# Altium PCB Basic_Board.PcbDoc
Units mm, origin at the board's own origin, x right, y up, seen from the top; angles counter-clockwise.
Board outline 48.64 x 27.18 mm, 2 copper layers (Top Layer, Bottom Layer); 38 components, 61 nets, 232 pads, 48 vias.
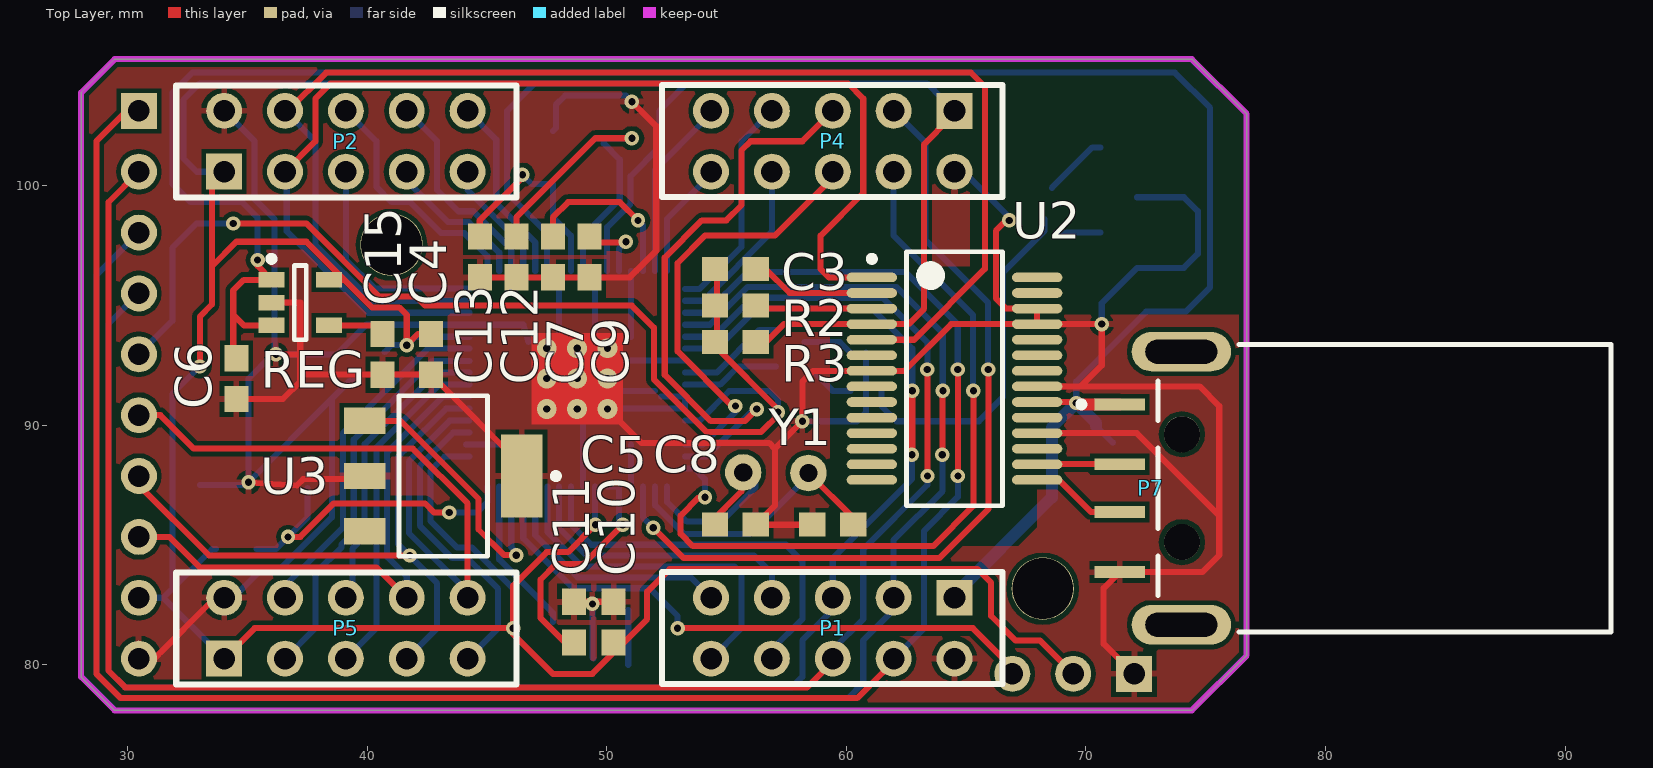
[diagram p0: Top Layer view]
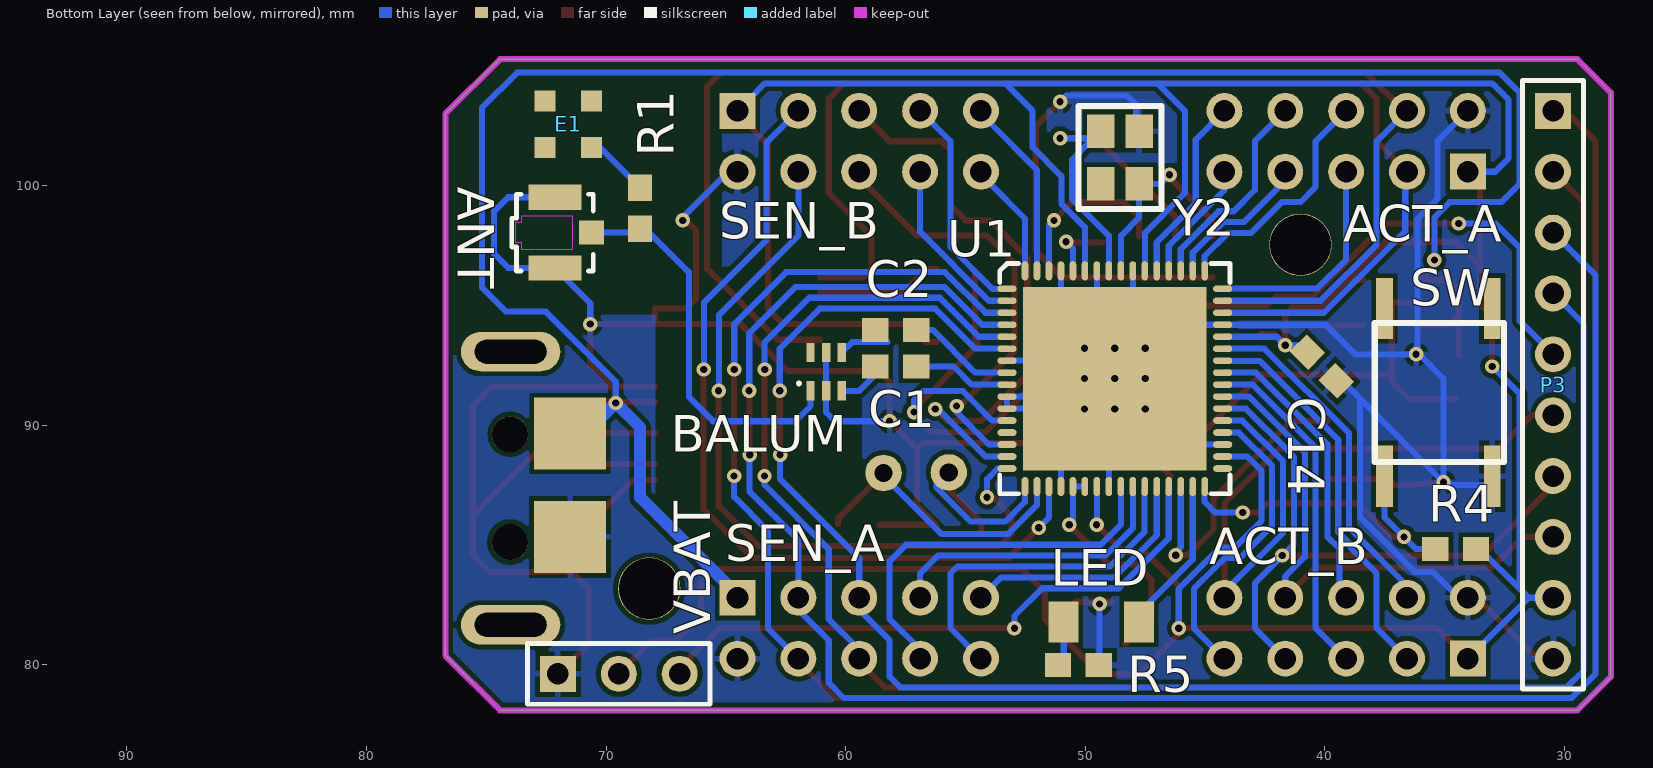
[diagram p1: Bottom Layer view, seen from below]

## Layer stack, top to bottom
Top Layer: signal copper 0.0356
Dielectric: dielectric 0.32, FR-4, Dk 4.8
Bottom Layer: signal copper 0.0356

## Board outline
29.464,78.105 28.067,79.502 28.067,103.886 29.464,105.283 74.422,105.283 76.708,102.997 76.708,80.391 74.422,78.105

## Design rules (kind name [scope] priority, off if disabled: settings)
Clearance [All] p1: gap=0.2
PolygonConnect [All] p1: connectstyle=Relief reliefconductorwidth=0.254 reliefentries=4 polygonreliefangle="90 Angle"
RoutingVias [All] p1: holewidth=0.3 width=0.6 viastyle="Through Hole" minholewidth=0.3 minwidth=0.8 maxholewidth=0.5 maxwidth=0.6
SilkscreenOverComponentPads [All] p1: minsilkscreentomaskgap=0.254
SolderMaskExpansion [All] p1: expansion=0.102
Width [All] p1: maxlimit=0.5 minlimit=0.15 preferedwidth=0.254
27 further rules are at their usual default settings.

## Components (designator, comment, footprint, x,y, rotation, side; value= is the part's Value field where it differs from the comment)
ANT "SMB" U.FL-R-SMT 72.136,98.044 r90 bottom (schematic designator ANT1)
BALUM "2.45 GHz" BALUN_SMD 61.468,91.44 r0 bottom (schematic designator BAL1)
C1 "Cap" 1608[0603] 57.912,92.456 r0 bottom
C2 "Cap" 1608[0603] 57.912,93.98 r0 bottom
C3 "Cap" 1608[0603] 55.372,96.52 r180 top (schematic designator C5)
C4 "Cap" 1608[0603] 42.672,92.964 r90 top
C5 "Cap" 1608[0603] 55.372,85.852 r0 top
C6 "Cap" 1608[0603] 34.544,91.948 r270 top
C7 "Cap" 1608[0603] 47.752,97.028 r270 top
C8 "Cap" 1608[0603] 59.436,85.852 r180 top
C9 "Cap" 1608[0603] 49.276,97.028 r270 top
C10 "Cap" 1608[0603] 50.292,81.788 r90 top
C11 "Cap" 1608[0603] 48.641,81.788 r270 top
C12 "Cap" 1608[0603] 46.228,97.028 r90 top
C13 "Cap" 1608[0603] 44.704,97.028 r90 top
C14 "Cap" 1608[0603] 40.132,92.456 r225 bottom
C15 "Cap" 1608[0603] 40.64,92.964 r90 top
E1 "Antenna" "Antennas 2.4G SMD MOLEX" 70.612,101.6 r90 bottom
LED "TX" 3015[1206] 47.752,81.788 r0 bottom (schematic designator D1)
P1 "SEN_A" HDR2X5_Female_Slim 64.516,82.804 r180 top
P2 "ACT_A" HDR2X5_Female_Slim 34.036,100.584 r0 top
P3 "Header 10" HDR1X10 30.48,103.124 r270 bottom
P4 "SEN_B" HDR2X5_Female_Slim 64.516,103.124 r180 top
P5 "ACT_B" HDR2X5_Female_Slim 34.036,80.264 r0 top
P7 "USB Type A" USBA_SMD 76.708,87.376 r0 top
R1 "Res2" 1608[0603] 68.58,99.06 r270 bottom
R2 "Res2" 1608[0603] 55.372,94.996 r0 top
R3 "Res2" 1608[0603] 55.372,93.472 r0 top (schematic designator R5)
R4 "Res2" 1608[0603] 34.544,84.836 r0 bottom
R5 "Res2" 1608[0603] 50.292,80 r180 bottom
REG "LD6806TD/33H" DBV005_N 37.211,95.123 r0 top
SW "SW-PB" "BUTTON SWITCH" 33.02,87.376 r90 bottom (schematic designator S1)
U1 "ATmega128RFA1-DE" MLF64-M2 48.768,91.948 r0 bottom
U2 "IC_FT232RL" SSOP-28 64.516,91.948 r0 top
U3 "DS2401Z" SOT-223 43.18,87.884 r270 top
VBAT "Header 2" HDR1X3 72.009,79.629 r180 bottom
Y1 "32.768KHz" Crystal 58.42,88.011 r180 top
Y2 "16MHz" "CrystalSMD TSX3225" 47.752,100.076 r90 bottom

## Footprints (in the part's own frame and the unit in brackets; to place one, negate y for a bottom-side part, rotate by r counter-clockwise, add the part's x,y. Pads: shape width x height; smd on the part's side, far side on the other; paste and mask are expansions set on the pad)
1608[0603] [mm] "Chip Capacitor; Body 1.6 x 0.8 mm (LxW typ)"
  rect 1.1x1 smd: 1(-0.85,0) 2(0.85,0)
  body extent -1,-0.5 0.9,0.5, height 1.3
3015[1206] [mm] "Chip Capacitor; Body 3.0 x 1.5 mm (LxW typ)"
  rect 1.25x1.7 smd: 1(0,0) 2(3.15,0)
  body extent 0,-0.9 3.15,0.9, height 1.3
"Antennas 2.4G SMD MOLEX" [mm]
  rect 0.87x0.87 smd mask+0.335: 1(0,0) ""(0,1.94) ""(1.94,0) ""(1.94,1.94)
BALUN_SMD [mm] "Harmonic Filter-Balun; Body 2.0 x 1.25 mm"
  rect 0.35x0.8 smd: 1(0,0) 2(-0.65,0) 3(-1.3,0) 4(-1.3,-1.6) 5(-0.65,-1.6) 6(0,-1.6)
  silkscreen extent 0.48,-0.3 0.48,-0.3, body extent -1.65,-1.43 0.35,-0.18, height 0.8
"BUTTON SWITCH" [mm]
  rect 2.55x0.7 smd: 1(0.5,0) 2(0.5,4.5) 3(7.5,0) 4(7.5,4.5)
  silkscreen extent 1.1,-0.5 6.9,4.9
Crystal [mil]
  round 60 hole 30: 1(0,0) 2(107.28,-0.99)
"CrystalSMD TSX3225" [mm]
  rect 1.4x1.15 smd: 1(0,0) 2(2.2,0) 3(2.2,1.6) 4(0,1.6)
  silkscreen extent -1.05,-0.93 3.25,2.53
DBV005_N [mm] "SOT23, 5-Leads, Body 2.9x1.6mm, Pitch 0.95mm, Lead Span 2.8mm, IPC Medium Density"
  rect 1.1x0.65 smd: 1(-1.2,0.95) 2(-1.2,0) 3(-1.2,-0.95) 4(1.2,-0.95) 5(1.2,0.95)
  silkscreen extent -1.32,-1.55 0.25,1.95, body extent -0.9,-1.55 0.9,1.55, height 1.45
HDR1X3 [mm] "Connector; Header; 3 Position"
  rect 1.5x1.5 hole 0.9: 1(0,0)
  round 1.5 hole 0.9: 2(2.54,0) 3(5.08,0)
  silkscreen extent -1.27,-1.27 6.35,1.27
HDR1X10 [mm] "Connector; Header; 10 Position"
  rect 1.5x1.5 hole 0.9: 1(0,0)
  round 1.5 hole 0.9: 2(2.54,0) 3(5.08,0) 4(7.62,0) 5(10.16,0) 6(12.7,0) 7(15.24,0) 8(17.78,0) 9(20.32,0) 10(22.86,0)
  silkscreen extent -1.27,-1.27 24.13,1.27
HDR2X5_Female_Slim [mm] "Connector; Header; 5x2 Housing"
  rect 1.5x1.5 hole 0.9: 1(0,0)
  round 1.5 hole 0.9: 2(0,2.54) 3(2.54,0) 4(2.54,2.54) 5(5.08,0) 6(5.08,2.54) 7(7.62,0) 8(7.62,2.54) 9(10.16,0) 10(10.16,2.54)
  silkscreen extent -2,-1.07 12.2,3.6
MLF64-M2 [mm]
  oval 0.8x0.28 smd paste-0.03 mask+0: 1(4.5,-3.75) 2(4.5,-3.25) 3(4.5,-2.75) 4(4.5,-2.25) 5(4.5,-1.75) 6(4.5,-1.25) 7(4.5,-0.75) 8(4.5,-0.25) 9(4.5,0.25) 10(4.5,0.75) 11(4.5,1.25) 12(4.5,1.75) 13(4.5,2.25) 14(4.5,2.75) 15(4.5,3.25) 16(4.5,3.75) 33(-4.5,3.75) 34(-4.5,3.25) 35(-4.5,2.75) 36(-4.5,2.25) 37(-4.5,1.75) 38(-4.5,1.25) 39(-4.5,0.75) 40(-4.5,0.25) 41(-4.5,-0.25) 42(-4.5,-0.75) 43(-4.5,-1.25) 44(-4.5,-1.75) 45(-4.5,-2.25) 46(-4.5,-2.75) 47(-4.5,-3.25) 48(-4.5,-3.75)
  oval 0.28x0.8 smd paste-0.03 mask+0: 17(3.75,4.5) 18(3.25,4.5) 19(2.75,4.5) 20(2.25,4.5) 21(1.75,4.5) 22(1.25,4.5) 23(0.75,4.5) 24(0.25,4.5) 25(-0.25,4.5) 26(-0.75,4.5) 27(-1.25,4.5) 28(-1.75,4.5) 29(-2.25,4.5) 30(-2.75,4.5) 31(-3.25,4.5) 32(-3.75,4.5) 49(-3.75,-4.5) 50(-3.25,-4.5) 51(-2.75,-4.5) 52(-2.25,-4.5) 53(-1.75,-4.5) 54(-1.25,-4.5) 55(-0.75,-4.5) 56(-0.25,-4.5) 57(0.25,-4.5) 58(0.75,-4.5) 59(1.25,-4.5) 60(1.75,-4.5) 61(2.25,-4.5) 62(2.75,-4.5) 63(3.25,-4.5) 64(3.75,-4.5)
  rect 7.65x7.65 smd paste-2.8 mask+0: 65(0,0)
  silkscreen extent -4.8,-4.8 4.8,4.8
SOT-223 [mm] "SOT-223/SC-73; 4 Leads; Body 6.7 x 7.3 mm, inc. leads (LxW max)"
  rect 3.45x1.75 smd: 1(0,3.275)
  rect 1.1x1.75 smd: 2(-2.3,-3.275) 3(2.3,-3.275) 4(0,-3.275)
  silkscreen extent -3.35,-1.85 3.35,4.83
SSOP-28 [mm] "28-Pin SSOP 0.65 mm Pitch"
  oval 2.1x0.4 smd: 1(-3.45,4.225) 2(-3.45,3.575) 3(-3.45,2.925) 4(-3.45,2.275) 5(-3.45,1.625) 6(-3.45,0.975) 7(-3.45,0.325) 8(-3.45,-0.325) 9(-3.45,-0.975) 10(-3.45,-1.625) 11(-3.45,-2.275) 12(-3.45,-2.925) 13(-3.45,-3.575) 14(-3.45,-4.225) 15(3.45,-4.225) 16(3.45,-3.575) 17(3.45,-2.925) 18(3.45,-2.275) 19(3.45,-1.625) 20(3.45,-0.975) 21(3.45,-0.325) 22(3.45,0.325) 23(3.45,0.975) 24(3.45,1.625) 25(3.45,2.275) 26(3.45,2.925) 27(3.45,3.575) 28(3.45,4.225)
  silkscreen extent -3.57,-5.3 2,5.3, body extent -2.7,-5.3 2.7,5.3, height 2
U.FL-R-SMT [mm]
  rect 1x1.05 smd: 1(0,-1.525)
  rect 1.05x2.2 smd: 2(-1.475,0) 2(1.475,0)
  Top Layer keep-out region: -0.686,-0.737 0.686,-0.737 0.686,1.397 0.406,1.397 0.406,1.651 -0.406,1.651 -0.406,1.397 -0.686,1.397
  silkscreen extent -1.6,-1.6 1.6,1.8, body extent -1.5,-1.55 1.5,1.55, height 1.25
USBA_SMD [mm]
  rect 2.1x0.5 smd: 1(-5.3,3.5) 2(-5.3,1) 3(-5.3,-1) 4(-5.3,-3.5)
  oval 4.15x1.65 hole 1 slot 3 at 0 deg: 5(-2.725,-5.7) 5(-2.725,5.7)
  round 1.5 hole 1.5: MH1(-2.7,-2.25) MH2(-2.7,2.25)
  silkscreen extent -7.02,-6 15.2,6, body extent -3.7,-6 15.2,6, height 4.5

## Part data
ANT: "SMB Straight Connector"
BALUM: library part BALUN
C1 C2 C3 C4 C5 C6 C7 C8 C9 C10 C11 C12 C13 C14 C15: "Capacitor"
E1: "Generic Antenna"
LED: library part "LED SMD (0603)"
P1 P2 P4 P5: library part "Header 5X2", "Header, 5-Pin, Dual row"
P3: "Header, 10-Pin"
P7: library part "Header 4", "Header, 4-Pin"
R1 R2 R3 R4 R5: "Resistor"
REG: library part TC1014-1.8VCT713, "50 mA, 100 mA and 150 mA CMOS LDOs with Active-Low Shutdown and Reference Bypass, 5-Pin SOT-23, Extended Temperature, Tape and Reel"
SW: "Switch"
U1: "802.15.4 compliant AVR transceiver"
U2: "FT232R USB UART"
U3: "Silicon Serial Number"
VBAT: library part "Header 3", "Header, 3-Pin"
Y1 Y2: library part XTAL, "Crystal Oscillator"

## Free pads (board coordinates)
  round 2.6 hole 2.54: 0(41.021,97.536) 0(68.199,83.185)
  rect 3x3 smd far side: 0(71.501,85.344) 0(71.501,89.662)

## Via types
v1: diameter 0.6, hole 0.3, Top Layer to Bottom Layer, 39 vias
v2: diameter 0.83, hole 0.3, Top Layer to Bottom Layer, 9 vias

## Nets (pads, with @x,y where several pads share a name; then routed paths per layer and width w, separated by ;. In a path a pad name is that pad's centre, name@x,y a point inside that pad or via, vN(x,y) a via of type N, cw(c..) or ccw(c..) an arc to the next point about the centre after c; other vN are vias at no path point)
5V: C6.1 P1.1 P7.1 pad.0@71.501,89.662 REG.1 REG.3 U2.20 | length 93
  Top Layer w0.254: C6.1@34.417,92.925 34.417,94.615 ; v1(35.433,96.899) 35.433,96.651 REG.1 34.859,96.073 34.417,95.631 34.417,94.615 ; REG.3 34.859,94.173 34.417,94.615 ; U2.20 69.596,90.973 v1@69.693,90.876
  Top Layer w0.5: v1@69.693,90.876 P7.1
  Bottom Layer w0.254: v1(35.433,96.899) 35.433,98.672 34.791,99.314 32.639,99.314 31.877,100.076 31.877,103.886 32.712,104.721 73.714,104.721 75.184,103.251 75.184,95.758 74.168,94.742 72.517,94.742 69.596,91.821 v1(69.596,90.932) ; pad.0@70.421,89.98 pad.0@71.12,89.281
  Bottom Layer w0.5: P1.1@64.389,82.804 68.58,86.995 68.58,89.916 v1(69.596,90.932) 70.421,90.106 pad.0@70.421,89.98
ADC0: P4.9 U1.63 | length 7.4
  Bottom Layer w0.254: U1.63 52.018,100.659 54.038,102.679 P4.9@54.038,103.06
ADC1: P4.10 U1.64 | length 4.6
  Bottom Layer w0.254: U1.64 52.518,98.619 53.975,100.076 P4.10@54.356,100.076
ADC2: P4.7 U1.1 | length 9.3
  Bottom Layer w0.254: U1.1 53.88,95.698 55.626,97.444 55.626,101.854 P4.7
ADC3: P4.8 U1.2 | length 7.3
  Bottom Layer w0.254: U1.2 54.022,95.198 56.896,98.072 P4.8
ADC4: P1.4 P3.1 U1.3 | length 85.8
  Top Layer w0.254: P3.1@29.972,103.124 28.702,101.854 28.702,79.629 29.718,78.613 60.452,78.613 P1.4@61.531,79.692 ; v1(64.651,92.329) 64.659,92.321 v1(64.659,87.884)
  Bottom Layer w0.254: U1.3 54.164,94.698 55.859,96.393 62.484,96.393 64.651,94.226 v1(64.651,92.329) ; P1.4 63.246,81.534 63.246,85.598 64.659,87.011 v1(64.659,87.884)
ADC5: P1.3 P3.3 U1.4 | length 80
  Top Layer w0.254: v1(64.008,88.773) v1@64.008,91.416
  Bottom Layer w0.254: P3.3 28.702,96.266 28.702,79.629 29.718,78.613 60.071,78.613 60.706,79.248 60.706,81.026 61.976,82.296 61.976,85.217 64.016,87.257 64.016,88.765 v1(64.008,88.773) ; U1.4 54.306,94.198 55.885,95.777 62.084,95.777 64.024,93.837 64.024,91.448 v1(64.032,91.44)
ADC6: P1.6 P3.2 U1.5 | length 78.1
  Top Layer w0.254: P3.2 29.21,99.314 29.21,79.763 29.906,79.067 58.366,79.067 P1.6@58.991,79.692 ; v1@63.381,87.892 v1(63.381,92.329)
  Bottom Layer w0.254: U1.5 54.448,93.698 56.073,95.323 61.522,95.323 63.381,93.464 v1(63.381,92.329) ; P1.6 59.436,80.645 60.706,81.915 60.706,84.836 63.389,87.519 v1(63.389,87.884)
ADC7: P1.5 P3.4 U1.6 | length 72.1
  Top Layer w0.254: v1@62.754,88.789 v1(62.754,91.44)
  Bottom Layer w0.254: P3.4 29.21,94.234 29.21,79.763 29.906,79.067 57.731,79.067 58.166,79.502 58.166,81.026 59.436,82.296 P1.5 59.436,84.455 62.738,87.757 v1(62.738,88.773) ; U1.6 54.59,93.198 56.261,94.869 61.087,94.869 62.754,93.202 v1(62.754,91.44)
CHG_SEN: U1.29 VBAT.3 | length 25.1
  Top Layer w0.254: v1(52.959,81.534) 65.278,81.534 VBAT.3@66.914,79.898
  Bottom Layer w0.254: U1.29 46.518,85.28 48.597,83.201 51.8,83.201 52.959,82.042 v1(52.959,81.534)
CTS: U2.11
D+: P7.3 U2.15 | length 4
  Top Layer w0.254: U2.15 68.868,87.723 70.215,86.376 P7.3@71.374,86.376
D-: P7.2 U2.16 | length 3.7
  Top Layer w0.254: U2.16@67.969,88.376 P7.2@71.628,88.392
DTR: C3.1 U2.2 | length 5.3
  Top Layer w0.254: C3.1 56.642,96.52 57.639,95.523 U2.2
GND: ANT.2 BALUM.2 BALUM.5 C4.1 C5.2 C6.2 C7.2 C8.2 C9.2 C10.2 C11.1 C12.1 C13.1 C14.2 C15.1 P1.2 P2.2 P3.10 P4.2 P5.2 P7.4 pad.0@71.501,85.344 R5.2 REG.2 SW.1 U1.7 U1.10 U1.11 U1.20 U1.24 U1.35 U1.45 U1.55 U1.58 U1.61 U1.65 U2.7 U2.18 U2.21 U2.25 U2.26 U3.1 U3.4 VBAT.1 Y2.2 | length 219.9
  Top Layer w0.254: P3.10 31.115,80.264 33.655,82.804 P5.2 ; C6.2 36.488,91.098 37.211,91.821 37.211,92.964 ; v1(35.052,87.622) 37.076,87.495 37.338,87.757 39.778,87.757 U3.4 ; REG.2@35.884,95.123 REG.2 37.211,95.123 37.211,92.964 ; v1(36.195,92.964) 37.211,92.964 ; 37.25,92.114 C15.1 C4.1 U3.1@46.571,88.215 ; C13.1 C12.1 C7.2 C9.2 50.966,96.178 51.235,96.447 51.235,96.454 52.07,97.289 52.07,102.489 v1(51.054,103.505) ; U3.1 U3.1@46.709,88.138 ; C11.1@48.895,82.638 C10.2@50.419,82.638 ; v2(50.038,90.679) 51.447,89.27 56.78,89.27 57.023,89.027 ; C8.2 C5.2 57.023,86.653 57.023,89.027 ; v1(66.802,98.552) 66.802,98.679 66.24,98.117 66.24,95.304 66.671,94.873 U2.26 U2.25 ; U2.18 72.125,89.673 75.565,86.233 ; U2.21 69.779,91.623 ; VBAT.1@72.446,79.446 72.173,79.446 70.739,80.881 70.739,83.207 P7.4 74.859,83.876 75.565,84.582 75.565,86.233 ; 57.023,89.027 v1(58.166,90.17) 58.166,91.821 58.618,92.273 U2.7 62.428,92.273 64.378,94.223 U2.25 ; U2.25 v1(70.661,94.223) 70.661,92.505 69.779,91.623 ; 69.779,91.623 74.747,91.623 75.565,90.805 75.565,86.233
  Bottom Layer w0.254: SW.1@33.02,87.503 35.052,87.503 v1(35.052,87.622) ; P5.2 34.422,82.804 35.499,83.881 36.256,83.881 38.535,86.16 38.535,91.105 ; P2.2 35.306,101.854 35.306,99.441 36.142,98.605 36.142,93.271 v1@36.195,93.218 ; v1@36.068,92.964 35.052,91.948 v1(35.052,87.622) ; v1(36.195,92.964) v1@36.195,93.218 ; C14.2@39.285,91.855 38.535,91.105 ; C14.2@39.412,91.855 C14.2 ; U1.35@44.141,89.198 U1.65@45.891,89.198 ; U1.65@46.736,93.472 46.518,94.198 U1.45 39.969,94.198 38.735,92.964 36.449,92.964 v1@36.195,93.218 ; Y2.2 47.879,102.403 47.879,103.378 48.26,103.759 50.8,103.759 v1(51.054,103.505) ; U1.65@48.018,92.698 U1.55 ; U1.65@48.768,91.44 U1.65@52.021,91.44 ; U1.24 U1.65@49.018,90.678 ; v1(49.403,82.55) 49.403,80.303 R5.2@49.442,80.264 ; U1.65@49.518,92.698 U1.7 ; U1.65@49.518,92.71 U1.58 ; U1.65@50.038,90.698 U1.11 U1.10 U1.65@52.263,91.198 ; U1.20 U1.65@51.018,89.19 ; U1.65@51.018,93.69 U1.61 ; v1(58.166,90.17) 60.452,90.17 60.818,90.536 BALUM.2 BALUM.5 ; P4.2@64.897,100.584 66.802,98.679 v1(66.802,98.552) ; v1(70.661,94.223) 70.661,95.094 72.136,96.569 74.09,96.569 74.676,97.155 74.676,98.933 74.09,99.519 ANT.2@72.136,99.519 ; v1(35.052,87.622) 38.535,91.105
  other v2: 47.498,90.678 48.768,90.679 47.498,91.948 48.768,91.949 50.038,91.949 47.498,93.217 48.768,93.218 50.038,93.218
MISO: P3.8 P5.8 U1.39 | length 23
  Top Layer w0.254: P3.8 31.75,85.344 33.02,84.074 40.386,84.074 P5.8
  Bottom Layer w0.254: P5.8 41.656,83.693 40.84,84.509 40.84,88.874 43.164,91.198 U1.39
MOSI: P3.7 P5.7 U1.38 | length 26.3
  Top Layer w0.254: P3.7 30.48,87.503 33.415,84.568 v1(41.783,84.568)
  Bottom Layer w0.254: P5.7 42.926,81.534 42.926,83.407 41.294,85.039 41.294,88.686 41.56,88.952 43.306,90.698 U1.38
NC: 
NetANT1_1: ANT.1 BALUM.1 R1.2 | length 16.4
  Bottom Layer w0.254: BALUM.1 61.468,90.805 62.103,90.17 65.532,90.17 66.548,91.186 66.548,96.393 68.263,98.108 R1.2@68.263,98.615 ; R1.2@68.746,98.044 ANT.1
NetBAL1_3: BALUM.3 C1.2 | length 1.7
  Bottom Layer w0.254: C1.2@58.737,92.138 59.436,91.44 BALUM.3
NetBAL1_4: BALUM.4 C2.2 | length 2.1
  Bottom Layer w0.254: 58.254,93.472 59.736,93.472 BALUM.4
NetC1_1: C1.1 U1.9 | length 4.1
  Bottom Layer w0.254: U1.9 54.736,91.698 55.494,92.456 C1.1
NetC2_1: C2.1 U1.8 | length 4.5
  Bottom Layer w0.254: U1.8 54.594,92.198 56.376,93.98 C2.1
NetC5_1: C5.1 U1.17 Y1.2 | length 9.7
  Top Layer w0.254: C5.1@54.334,85.532 54.334,85.956 55.626,87.249 55.626,88.348 Y1.2@55.695,88.417
  Bottom Layer w0.254: U1.17 52.518,86.808 53.347,85.979 54.781,85.979 56.203,87.401 Y1.2@56.203,88.417
NetC7_1: C7.1 U1.62 | length 7.1
  Top Layer w0.254: C7.1 47.752,98.679 48.387,99.314 50.546,99.314 v1(51.308,98.552)
  Bottom Layer w0.254: v1(51.308,98.552) 51.518,98.342 U1.62
NetC8_1: C8.1 U1.18 Y1.1 | length 12.1
  Top Layer w0.254: Y1.1 60.325,86.106 C8.1@60.325,85.891
  Bottom Layer w0.254: U1.18 52.018,86.666 53.213,85.471 56.007,85.471 Y1.1@58.801,88.265
NetC9_1: C9.1 U1.60 | length 2.9
  Top Layer w0.254: C9.1@49.276,97.624 50.761,97.624 v1(50.8,97.663)
  Bottom Layer w0.254: U1.60 50.518,97.381 v1(50.8,97.663)
NetC11_2: C11.2 U1.21 U1.22 | length 9.7
  Top Layer w0.254: C11.2@48.348,80.899 48.299,80.899 47.244,81.954 47.244,83.566 47.879,84.201 49.022,84.201 v1(50.673,85.852)
  Bottom Layer w0.254: U1.22 U1.21 50.518,86.007 v1(50.673,85.852)
NetC12_2: C12.2 U1.57 Y2.3 | length 14.7
  Top Layer w0.254: C12.2 46.228,98.679 49.53,101.981 v1(51.054,101.981)
  Bottom Layer w0.254: U1.57 49.018,97.913 50.546,99.441 50.546,100.526 50.546,101.092 Y2.3@49.87,101.768 ; Y2.3@49.565,101.981 v1(51.054,101.981)
NetC13_2: C13.2 U1.56 Y2.1 | length 8.6
  Top Layer w0.254: C13.2 44.704,98.552 v1@46.482,100.33
  Bottom Layer w0.254: v1(46.482,100.457) 46.863,100.076 Y2.1 47.752,98.679 48.51,97.921 U1.56@48.51,96.448
NetC15_2: C15.2 REG.4 | length 2.2
  Top Layer w0.254: REG.4 C15.2@40.64,94.173
NetD1_1: LED.1 U1.31 | length 6.6
  Bottom Layer w0.254: U1.31 45.518,84.405 47.752,82.171 LED.1
NetD1_2: LED.2 R5.1 | length 2.3
  Bottom Layer w0.254: R5.1@50.902,80.01 LED.2@50.902,82.296
NetE1_1: E1.1 R1.1 | length 2.7
  Bottom Layer w0.254: R1.1 70.27,101.6 E1.1
NetR4_2: R4.2 SW.2 U1.32 | length 14.3
  Top Layer w0.254: v1(36.703,85.344) 37.211,85.344 38.608,86.741 42.418,86.741 42.799,86.36 v1(43.434,86.36)
  Bottom Layer w0.254: R4.2 36.195,84.836 v1(36.703,85.344) ; v1@36.703,85.471 v1(36.703,85.344) ; SW.2@37.52,86.962 37.52,87.376 37.52,86.161 v1(36.703,85.344) ; v1(43.434,86.36) 44.577,86.36 45.018,86.801 U1.32
NetU1_30: U1.30 U3.2 | length 12.5
  Top Layer w0.254: U3.2 41.395,90.184 44.65,86.929 44.65,85.652 45.72,84.582 v1(46.228,84.582)
  Bottom Layer w0.254: U1.30 46.018,84.919 46.355,84.582 v1(46.228,84.582)
PB0: P5.9 U1.36 | length 12.9
  Bottom Layer w0.254: P5.9 45.466,81.534 45.466,83.171 44.61,84.027 44.61,84.034 44.189,84.455 43.561,84.455 42.202,85.814 42.202,88.31 43.59,89.698 U1.36
PB1: P3.6 P5.10 U1.37 | length 29.1
  Top Layer w0.254: P3.6 31.369,90.424 32.766,89.027 41.91,89.027 44.196,86.741 P5.10
  Bottom Layer w0.254: P5.10 44.196,83.058 41.748,85.506 41.748,88.498 43.448,90.198 U1.37
PB4: P5.5 U1.40 | length 14.3
  Bottom Layer w0.254: P5.5 40.386,81.534 40.386,89.062 43.022,91.698 U1.40
PB5: P5.6 U1.41 | length 12.3
  Bottom Layer w0.254: P5.6 39.389,83.077 39.389,84.841 39.897,85.349 39.897,89.215 42.88,92.198 U1.41
PB6: P5.3 U1.42 | length 16.5
  Bottom Layer w0.254: P5.3 37.846,81.534 37.846,83.82 38.935,84.909 38.935,85.029 39.443,85.537 39.443,89.403 42.73,92.69 U1.42@44.268,92.69
PB7: P5.4 U1.43 | length 14.6
  Bottom Layer w0.254: P5.4 36.576,83.312 38.989,85.725 38.989,89.662 42.525,93.198 U1.43
PD0: P1.8 U1.25 | length 16.1
  Bottom Layer w0.254: U1.25 48.518,85.855 49.356,85.017 57.477,85.017 58.166,84.328 58.166,81.915 P1.8@56.896,80.645
PD1: P1.7 U1.26 | length 12.4
  Bottom Layer w0.254: U1.26 48.018,85.713 49.168,84.563 54.883,84.563 56.153,84.563 56.896,83.82 P1.7
PD2: P1.10 U1.27 | length 14.8
  Bottom Layer w0.254: U1.27@47.526,87.448 47.526,85.556 48.973,84.109 55.337,84.109 55.626,83.82 55.626,81.534 P1.10
PD3: P1.9 U1.28 | length 10.4
  Bottom Layer w0.254: U1.28 47.018,85.422 48.785,83.655 52.461,83.655 53.505,83.655 P1.9
PE0: P2.3 U1.46 U2.1 | length 48.6
  Top Layer w0.254: P2.3 37.846,101.854 37.846,103.632 38.481,104.267 60.071,104.267 60.706,103.632 60.706,99.695 58.928,97.917 58.928,96.52 59.275,96.173 U2.1
  Bottom Layer w0.254: P2.3 36.649,100.511 36.649,98.098 40.049,94.698 U1.46
PE1: P2.4 U1.47 U2.5 | length 57.2
  Top Layer w0.254: P2.4 36.696,103.124 38.293,104.721 65.205,104.721 65.786,104.14 65.786,96.527 62.832,93.573 U2.5
  Bottom Layer w0.254: P2.4 37.846,101.854 37.846,97.543 40.191,95.198 U1.47
PE2: P2.5 U1.48 | length 9.3
  Bottom Layer w0.254: P2.5 39.116,96.915 40.316,95.715 44.251,95.715 U1.48
PE3: P2.6 U1.49 | length 10.1
  Bottom Layer w0.254: P2.6 40.386,101.854 40.386,99.949 41.021,99.314 41.798,99.314 43.087,98.025 44.06,98.025 45.018,97.067 U1.49
PE4: P2.7 U1.50 | length 6.2
  Bottom Layer w0.254: P2.7 41.656,100.203 43.38,98.479 44.248,98.479 45.518,97.209 U1.50
PE5: P2.8 U1.51 | length 8.8
  Bottom Layer w0.254: P2.8 42.926,101.854 42.926,99.822 43.815,98.933 44.436,98.933 46.018,97.351 U1.51
PE6: P2.9 U1.52 | length 5.1
  Bottom Layer w0.254: P2.9 44.196,99.815 46.518,97.493 U1.52
PE7: P2.10 U1.53 | length 7.8
  Bottom Layer w0.254: P2.10 45.393,101.927 45.393,99.26 45.466,99.187 47.018,97.635 U1.53
PG0: P4.6 U1.14 | length 17.2
  Top Layer w0.254: v1@55.245,90.805 52.959,93.091 52.959,96.774 54.102,97.917 57.023,97.917 P4.6@59.055,99.949
  Bottom Layer w0.254: U1.14 54.019,89.198 55.372,90.551 v1(55.372,90.805)
PG1: P4.5 U1.15 | length 24.4
  Top Layer w0.254: v1(56.261,90.678) 55.761,90.178 54.348,90.178 52.423,92.103 52.423,97 53.975,98.552 54.991,98.552 55.626,99.187 55.626,101.473 56.007,101.854 58.166,101.854 P4.5
  Bottom Layer w0.254: U1.15 54.161,88.698 56.141,90.678 v1(56.261,90.678)
PG2: P4.4 U1.16 | length 32.3
  Top Layer w0.254: v1@53.848,86.995 53.086,86.233 53.086,85.471 53.594,84.963 63.627,84.963 65.302,86.638 v1(65.302,91.44)
  Bottom Layer w0.254: U1.16 53.661,88.198 54.102,87.757 v1(54.102,86.995) ; P4.4@61.341,100.584 61.976,99.949 61.976,97.917 65.294,94.599 65.294,91.448 v1(65.302,91.44)
PG5: P4.3 U1.19 | length 35.5
  Top Layer w0.254: v1(51.943,85.725) 53.213,84.455 63.881,84.455 65.929,86.503 65.929,92.321 v1(65.921,92.329)
  Bottom Layer w0.254: U1.19 51.518,86.15 v1(51.943,85.725) ; P4.3 63.309,101.79 63.309,97.727 65.921,95.115 v1(65.921,92.329) v1@65.929,92.321
RESET: C3.2 P3.5 R2.1 R3.1 U1.12 | length 48
  Top Layer w0.254: v1(34.417,98.425) 37.465,98.425 40.513,95.377 41.129,95.377 42.037,95.377 42.418,94.996 51.054,94.996 51.969,94.081 51.969,91.915 54.16,89.724 56.448,89.724 v1@57.212,90.489 ; R3.1 54.522,93.304 v1@57.212,90.613 ; R3.1@54.61,93.472 C3.2@54.61,96.432
  Bottom Layer w0.254: P3.5 31.877,94.361 31.877,97.409 32.893,98.425 v1(34.417,98.425) ; U1.12 53.878,90.198 55.112,91.432 56.777,91.432 57.15,91.059 v1(57.15,90.551)
RTS: R2.2 U2.3 | length 4.7
  Top Layer w0.254: R2.2@56.345,94.873 U2.3
VCC: C4.2 C10.1 C14.1 P2.1 P3.9 P4.1 P5.1 R3.2 R4.1 REG.5 U1.23 U1.34 U1.44 U1.54 U1.59 U2.4 VBAT.2 | length 174.1
  Top Layer w0.254: v1(33.02,92.456) 33.02,94.54 33.528,95.048 33.528,96.647 ; P5.1 35.306,81.534 v1@45.847,81.534 ; P2.1 33.528,100.076 33.528,96.647 ; REG.5 39.03,96.073 ; C4.2 42.125,93.814 v1(41.656,93.345) 41.656,94.608 41.341,94.923 40.205,94.923 37.465,97.663 34.544,97.663 33.528,96.647 ; v1(49.53,85.852) 48.387,84.709 47.498,84.709 46.101,83.312 v1(46.101,81.534) 46.101,81.28 47.752,79.629 49.403,79.629 51.689,81.915 51.689,83.058 52.632,84.001 65.478,84.001 66.04,83.439 66.04,82.042 67.056,81.026 68.072,81.026 69.342,79.756 VBAT.2@69.596,79.756 ; R3.2 56.642,93.472 57.393,94.223 U2.4 62.6,94.223 63.246,94.869 63.246,101.727 64.325,102.806 P4.1@64.325,103.441
  Bottom Layer w0.254: P3.9 31.496,82.804 ; v1(33.02,92.456) 31.877,91.313 31.877,83.185 ; R4.1 33.528,84.836 31.877,83.185 ; P5.1 31.496,82.804 ; P2.1 32.893,100.584 32.331,101.146 32.331,103.578 33.02,104.267 46.99,104.267 ; C14.1 41.021,93.345 v1(41.656,93.345) 42.009,93.698 U1.44 ; U1.34 43.232,88.698 42.656,88.122 42.656,86.002 43.749,84.909 44.377,84.909 45.064,84.222 ; 45.064,84.215 46.101,83.178 v1(46.101,81.534) ; U1.54 47.518,98.024 45.847,99.695 45.847,103.124 46.99,104.267 ; U1.23 49.518,85.991 49.594,85.915 49.657,85.852 v1(49.53,85.852) ; U1.59 50.018,98.271 51,99.253 51,100.403 52.197,101.6 52.197,103.124 53.34,104.267 ; P4.1@64.008,103.632 63.373,104.267 53.34,104.267 ; 31.496,82.804 31.877,83.185 ; 46.99,104.267 53.34,104.267
pads on no net: BALUM.6 E1. P7.5 P7.MH1 P7.MH2 SW.3 SW.4 U1.13 U1.33 U2.6 U2.8 U2.9 U2.10 U2.12 U2.13 U2.14 U2.17 U2.19 U2.22 U2.23 U2.24 U2.27 U2.28 U3.3 Y2.4

## Polygon pours and split planes (outlines as drawn)
GND on Top Layer "Bottom Layer-GND" (solid, remove dead copper, pour order 1001): 29.464,105.283 28.067,103.886 28.067,79.502 29.845,77.724 74.041,77.724 76.708,80.391 76.708,94.615 67.966,94.615 67.966,85.746 67.183,84.963 59.309,84.963 59.309,96.647 65.151,96.647 65.151,105.283 29.464,105.283
GND on Bottom Layer "Bottom Layer-GND" (solid, remove dead copper, pour order 1000): 29.464,105.283 28.067,103.886 28.067,79.502 29.845,77.724 74.041,77.724 76.708,80.391 76.708,94.615 67.945,94.615 67.945,85.725 67.183,84.963 66.802,84.582 59.309,84.582 59.309,96.647 65.151,96.647 65.151,105.283 29.464,105.283

## Keep-outs
Keep-Out Layer:
  the board outline again, w0.254

## Other copper
Top Layer:
  rectangle net GND: 46.863,90.043 50.673,93.853

## Text inside footprints (layer, text, board x,y; h text height)
P7: Mechanical 1 "PCB Edge" at 77.181,82.203 h0.25 r90